# Altium PCB cont_board.PcbDoc
Units mm, origin at the board's own origin, x right, y up, seen from the top; angles counter-clockwise.
Board outline 79.5 x 48 mm, 2 copper layers (Top Layer, Bottom Layer); 23 components, 52 nets, 192 pads, 25 vias.
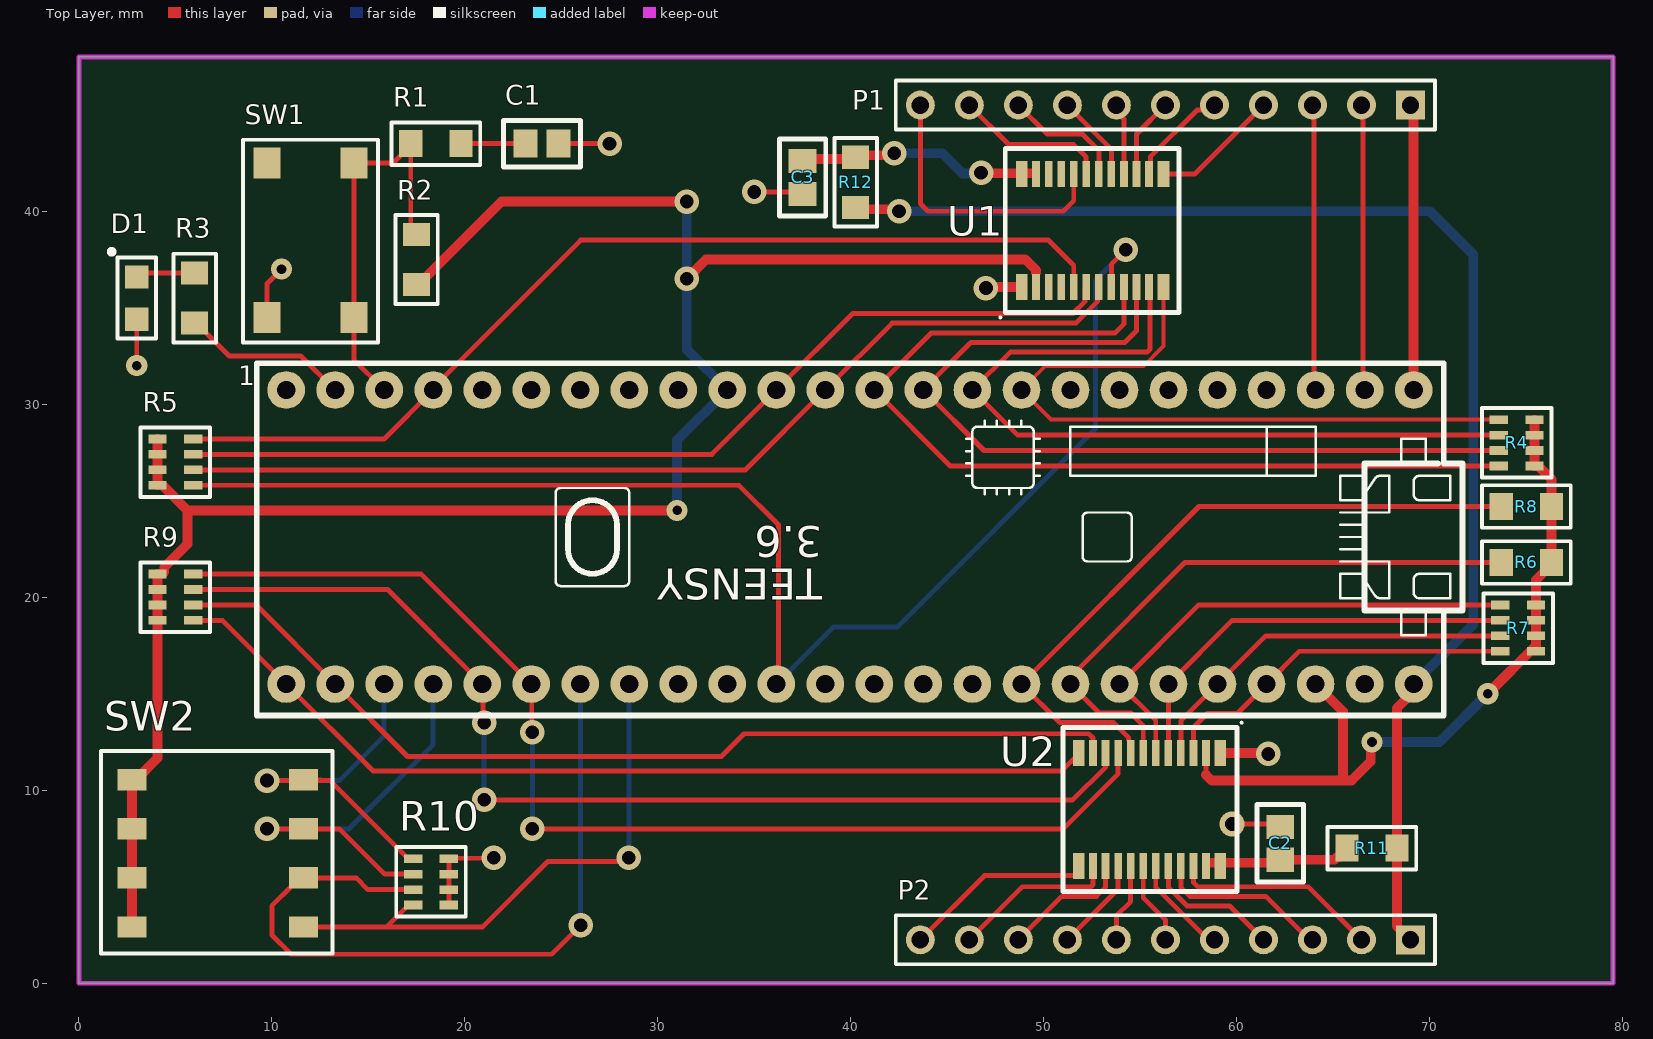
[diagram p0: Top Layer view]
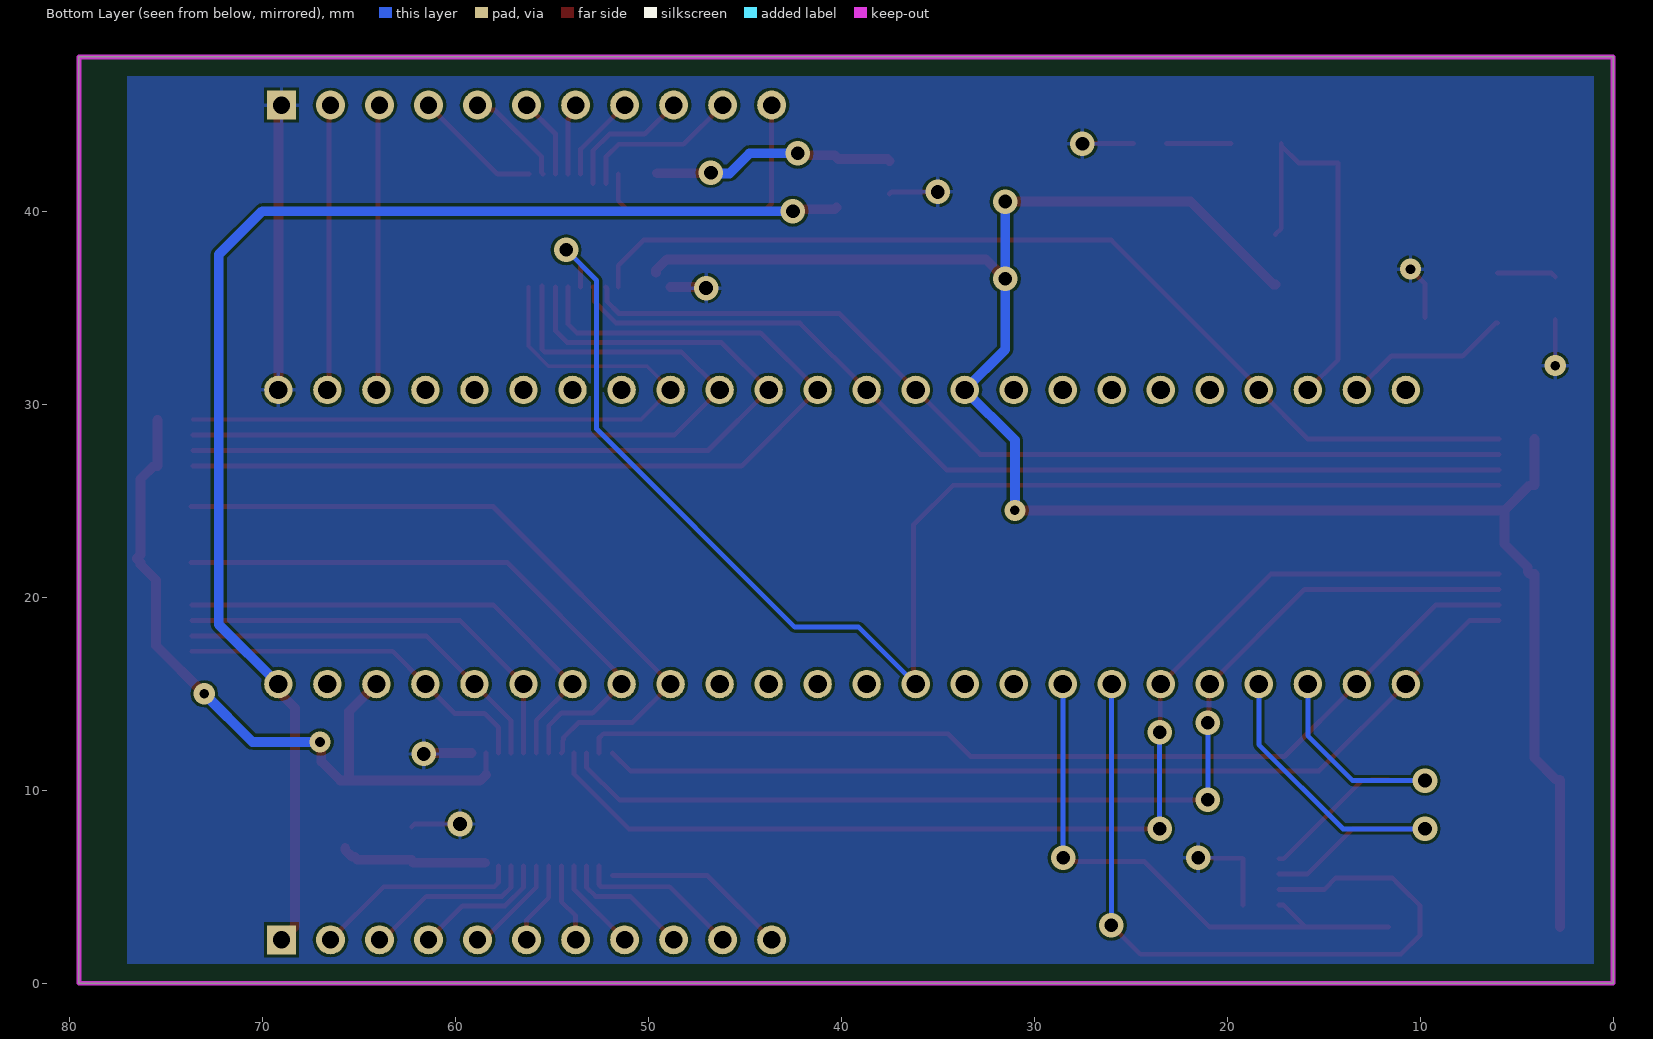
[diagram p1: Bottom Layer view, seen from below]

## Layer stack, top to bottom
Top Solder: solder mask 0.0102, Solder Resist, Dk 3.5
Top Layer: signal copper 0.0356
Dielectric 1: dielectric 0.32, FR-4, Dk 4.8
Bottom Layer: signal copper 0.0356
Bottom Solder: solder mask 0.0102, Solder Resist, Dk 3.5

## Board outline
0,0 79.5,0 79.5,48 0,48

## Design rules (kind name [scope] priority, off if disabled: settings)
BoardOutlineClearance [All] p1: gap=0.381 ignorepadtopadclearanceinfootprint=FALSE
Clearance [All] p1: gap=0.152 ignorepadtopadclearanceinfootprint=FALSE except(0: Arc-Hole Track-Hole SMDPad-Hole THPad-Hole Via-Hole Fill-Hole Poly-Hole Region-Hole Text-Hole)
ComponentClearance [All] p1: gap=0.025 collisioncheckmode=3 verticalgap=0.025 showdistances=FALSE
DiffPairsRouting [All] p1: maxlimit=10 minlimit=0.152 mostfreqgap=0.203 toplayer_minwidth=0.152 toplayer_maxwidth=0.381 toplayer_prefwidth=0.203 bottomlayer_minwidth=0.152 bottomlayer_maxwidth=0.381 bottomlayer_prefwidth=0.203 maxuncoupledlength=12.7
HoleSize [All] p1: absolutevalues=TRUE maxlimit=6.731 minlimit=0.33 maxpercent=80.000 minpercent=20.000
HoleToHoleClearance [All] p1: gap=0.254 allowstackedmicrovias=FALSE
MinimumAnnularRing [All] p1: minimumring=0.178
MinimumSolderMaskSliver [All] p1: minsoldermaskwidth=0
PlaneClearance [All] p1: clearance=0.254
PlaneConnect [All] p1: planeconnectstyle=Direct reliefexpansion=0.406 reliefentries=4 reliefconductorwidth=0.152 reliefairgap=0.152
PolygonConnect [All] p1: connectstyle=Relief reliefconductorwidth=0.203 reliefentries=4 polygonreliefangle="90 Angle" airgapwidth=0.152
RoutingCorners [All] p1: cornerstyle=45-Degree minsetback=1.25 maxsetback=1.25
RoutingVias [All] p1: holewidth=0.381 width=0.762 viastyle="Through Hole" minholewidth=0.33 minwidth=0.686 maxholewidth=2.54 maxwidth=2.896
SilkToSilkClearance [All] p1: silktosilkclearance=0
SilkToSolderMaskClearance [IsPad] p1: minsilkscreentomaskgap=0.152 clearancetoexposedcopper=TRUE
SolderMaskExpansion [All] p1: expansion=0.075 istentingtop=FALSE
Width [All] p1: maxlimit=10.16 minlimit=0.152 preferedwidth=0.203
20 further rules are at their usual default settings.

## Components (designator, comment, footprint, x,y, rotation, side; value= is the part's Value field where it differs from the comment)
1 "TEENSY_3.5/3.6" TEENSY_3.5/3.6 41.22,23.12 r180 top
C1 "1uF" CAP_0805 24,43.5 r180 top
C2 "0.1uF" CAP_0805 62.25,7.25 r270 top
C3 "0.1uF" CAP_0805 37.5,41.75 r90 top
D1 "RED" 150080SS75000 3,35.5 r90 top
P1 "Header 11" HDR1X11 69,45.5 r180 top
P2 "Header 11" HDR1X11 69,2.25 r180 top
R1 "4.7kR" RES_0805_PANASONIC 18.5,43.5 r90 top
R2 "4.7kR" RES_0805_PANASONIC 17.5,37.5 r180 top
R3 "330R" RES_0805_PANASONIC 6,35.5 r0 top
R4 "4.7kR" CAY16-472J4LF 74.5,28 r270 top
R5 "4.7kR" CAY16-472J4LF 5,27 r90 top
R6 "4.7kR" RES_0805_PANASONIC 75,21.8 r90 top
R7 "4.7kR" CAY16-472J4LF 74.575,18.4 r270 top
R8 "4.7kR" RES_0805_PANASONIC 75,24.7 r90 top
R9 "4.7kR" CAY16-472J4LF 5,20 r90 top
R10 "4.7kR" CAY16-472J4LF 18.25,5.25 r90 top
R11 "200kR" RES_0805_PANASONIC 67,7 r90 top
R12 "200kR" RES_0805_PANASONIC 40.25,41.5 r0 top
SW1 "B3FS-1000P" B3FS-1000P 12,38.5 r90 top
SW2 "DIP 4 SWITCH" DS04-254-2-04BK-SMT-TR 11.65,10.54 r270 top
U1 "NVT2010PW" NVT2010 52.5,39 r90 top
U2 "NVT2010PW" NVT2010 55.5,9 r270 top

## Footprints (in the part's own frame and the unit in brackets; to place one, negate y for a bottom-side part, rotate by r counter-clockwise, add the part's x,y. Pads: shape width x height; smd on the part's side, far side on the other; paste and mask are expansions set on the pad)
150080SS75000 [mm] "150080SS75000"
  rect 1.2x1.2 smd mask+0.06: 1(-1.1,0) 2(1.1,0)
  silkscreen extent -2.1,-1 2.52,1.42
B3FS-1000P [mm] "B3FS-1000P"
  rect 1.6x1.4 smd mask+0.06: 1(-4,2.25) 1(4,2.25) 2(-4,-2.25) 2(4,-2.25)
  silkscreen extent -5.3,-3.5 5.2,3.5, body extent -4.1,-3.15 3.9,3.15, height 3.11
CAP_0805 [mm] "Chip Capacitor, 2-Leads, Body 2.05x1.30mm, IPC Medium Density"
  rect 1.25x1.45 smd mask+0.06: 1(-0.85,0) 2(0.85,0)
  silkscreen extent -2,-1.2 2,1.2, body extent -1.07,-0.7 1.07,0.7, height 1.25
CAY16-472J4LF [mm] "CAY16-472J4LF"
  rect 0.45x0.95 smd mask+0.06: 1(-1.2,0.925) 2(-1.2,-0.925) 3(-0.4,0.925) 4(-0.4,-0.925) 5(0.4,0.925) 6(0.4,-0.925) 7(1.2,0.925) 8(1.2,-0.925)
  silkscreen extent -1.8,-1.8 1.8,1.8, body extent -1.6,-0.8 1.6,0.8, height 0.51
DS04-254-2-04BK-SMT-TR [mm] "DIP SWITCH, SPST, 2.54 PITCH, FL"
  rect 1.1x1.5 smd mask+0.06: 1(0,0) 2(2.54,0) 3(5.08,0) 4(7.62,0) 5(7.62,-8.9) 6(5.08,-8.9) 7(2.54,-8.9) 8(0,-8.9)
  silkscreen extent -1.5,-10.5 9,1.5, body extent -1.78,-9.42 9.38,0.47, height 4.01
HDR1X11 [mm] "Connector; Header; 11 Position"
  rect 1.5x1.5 hole 0.9: 1(0,0)
  round 1.5 hole 0.9: 2(2.54,0) 3(5.08,0) 4(7.62,0) 5(10.16,0) 6(12.7,0) 7(15.24,0) 8(17.78,0) 9(20.32,0) 10(22.86,0) 11(25.4,0)
  silkscreen extent -1.27,-1.27 26.67,1.27
NVT2010 [mm]
  rect 1.35x0.6 smd mask+0.05: 1(-2.925,3.65) 12(-2.925,-3.7) 13(2.925,-3.7) 24(2.925,3.65)
  rect 1.35x0.4 smd mask+0.05: 2(-2.925,2.9) 3(-2.925,2.25) 4(-2.925,1.6) 5(-2.925,0.95) 6(-2.925,0.3) 7(-2.925,-0.35) 8(-2.925,-1) 9(-2.925,-1.65) 10(-2.925,-2.3) 11(-2.925,-2.95) 14(2.925,-2.95) 15(2.925,-2.3) 16(2.925,-1.65) 17(2.925,-1) 18(2.925,-0.35) 19(2.925,0.3) 20(2.925,0.95) 21(2.925,1.6) 22(2.925,2.25) 23(2.925,2.9)
  silkscreen extent -4.55,-4.5 4.25,4.8
RES_0805_PANASONIC [mm]
  rect 1.4x1.2 smd mask+0.06: 1(0,1.3) 2(0,-1.3)
  silkscreen extent -1.1,-2.3 1.1,2.3
TEENSY_3.5/3.6 [mm]
  round 1.95 / inner round 1.473 / far side round 1.473 hole 0.95 mask+0.06: 0/RX(-25.4,-7.62) 1/TX(-22.86,-7.62) 2(-20.32,-7.62) 3/CANTX(-17.78,-7.62) 3V3(7.62,-7.62) 3V3_LO(-22.86,7.62) 4/CANRX(-15.24,-7.62) 5(-12.7,-7.62) 6(-10.16,-7.62) 7(-7.62,-7.62) 8(-5.08,-7.62) 9/CS(-2.54,-7.62) 10/CS(0,-7.62) 11/MOSI(2.54,-7.62) 12/MISO(5.08,-7.62) 13/SCK(5.08,7.62) 14/A0(2.54,7.62) 15/A1(0,7.62) 16/A2(-2.54,7.62) 17/A3(-5.08,7.62) 18/A4/SDA(-7.62,7.62) 19/A5/SCL(-10.16,7.62) 20/A6(-12.7,7.62) 21/A7(-15.24,7.62) 21/DAC0(12.7,7.62) 22/A8(-17.78,7.62) 23/A9(-20.32,7.62) 24(10.16,-7.62) 25(12.7,-7.62) 26(15.24,-7.62) 27(17.78,-7.62) 28(20.32,-7.62) 29(22.86,-7.62) 30(25.4,-7.62) 31/A12(27.94,-7.62) 32/A13(30.48,-7.62) 33/A14(30.48,7.62) 34/A15(27.94,7.62) 35/A16(25.4,7.62) 36/A17(22.86,7.62) 37/A18(20.32,7.62) 38/A19(17.78,7.62) 39/A20(15.24,7.62) A22/DAC1(10.16,7.62) AGND(-25.4,7.62) GND(-27.94,-7.62) GND2(7.62,7.62) VIN(-27.94,7.62)
  silkscreen extent -30.48,-9 32,9.25

## Part data
C1: library part C0805C105Z4VACTU, "Cap Ceramic 1uF 16V Y5V -20% to 80% Pad SMD 0805 85C T/R", Case Code (Imperial)=0805, Case Code (Metric)=2012, Dielectric=Y5V, Dielectric Material=Ceramic, Manufacturer=KEMET, Max Operating Temperature=85°C, Min Operating Temperature=-30°C, Package Quantity=1, Supplier Part Number 1=399-8011-1-ND, Tolerance=80%, Voltage=16V, Capacitance=1uF, Case/Package=0805, Category=Capacitor, ComponentLink1Description=https://datasheet.ciiva.com/6074/1698780-6074369.pdf?src-supplier=Farnell, ComponentLink1URL=https://datasheet.ciiva.com/6074/1698780-6074369.pdf?src-supplier=Farnell, ComponentLink2Description=https://datasheet.ciiva.com/16623/datasheetpn-c0805c105z4vac7800-16623623.pdf?src-supplier=Avnet+Europe, ComponentLink2URL=https://datasheet.ciiva.com/16623/datasheetpn-c0805c105z4vac7800-16623623.pdf?src-supplier=Avnet+Europe, ComponentLink3Description=https://datasheet.ciiva.com/14604/70095383-14604106.pdf?src-supplier=Allied+Electronics, ComponentLink3URL=https://datasheet.ciiva.com/14604/70095383-14604106.pdf?src-supplier=Allied+Electronics, ComponentLink4Description=https://datasheet.ciiva.com/7600/1698780-7600029.pdf?src-supplier=Newark, ComponentLink4URL=https://datasheet.ciiva.com/7600/1698780-7600029.pdf?src-supplier=Newark, ComponentLink5Description=https://datasheet.ciiva.com/14589/70095383-14589407.pdf?src-supplier=Allied+Electronics, ComponentLink5URL=https://datasheet.ciiva.com/14589/70095383-14589407.pdf?src-supplier=Allied+Electronics, ComponentLink6Description=http://datasheet.octopart.com/C0805C105Z4VACTU-Kemet-datasheet-13692877.pdf?src-supplier=Element14, ComponentLink6URL=http://datasheet.octopart.com/C0805C105Z4VACTU-Kemet-datasheet-13692877.pdf?src-supplier=Element14, ComponentLink7Description=http://datasheet.octopart.com/C0805C105Z4VACTU-Kemet-datasheet-503297.pdf?src-supplier=Newark, ComponentLink7URL=http://datasheet.octopart.com/C0805C105Z4VACTU-Kemet-datasheet-503297.pdf?src-supplier=Newark, ComponentLink8Description=http://datasheet.octopart.com/C0805C105Z4VACTU-KEMET-datasheet-101576167.pdf?src-supplier=Farnell, ComponentLink8URL=http://datasheet.octopart.com/C0805C105Z4VACTU-KEMET-datasheet-101576167.pdf?src-supplier=Farnell, ComponentLink9Description=http://datasheet.octopart.com/C0805C105Z4VACTU-KEMET-datasheet-83957834.pdf?src-supplier=TME, ComponentLink9URL=http://datasheet.octopart.com/C0805C105Z4VACTU-KEMET-datasheet-83957834.pdf?src-supplier=TME, ComponentLink10Description=http://datasheet.octopart.com/C0805C105Z4VACTU-Kemet-datasheet-5313890.pdf?src-supplier=Verical, ComponentLink10URL=http://datasheet.octopart.com/C0805C105Z4VACTU-Kemet-datasheet-5313890.pdf?src-supplier=Verical, ComponentLink11Description=http://datasheet.octopart.com/C0805C105Z4VAC-TU-Kemet-datasheet-8204015.pdf?src-supplier=Jameco, ComponentLink11URL=http://datasheet.octopart.com/C0805C105Z4VAC-TU-Kemet-datasheet-8204015.pdf?src-supplier=Jameco, ComponentLink12Description=http://datasheet.octopart.com/C0805C105Z4VACTU-Kemet-datasheet-464.pdf?src-supplier=Allied+Electronics, ComponentLink12URL=http://datasheet.octopart.com/C0805C105Z4VACTU-Kemet-datasheet-464.pdf?src-supplier=Allied+Electronics, ComponentLink13Description=http://datasheet.octopart.com/C0805C105Z4VACTU-Kemet-datasheet-11554470.pdf?src-supplier=Arrow, ComponentLink13URL=http://datasheet.octopart.com/C0805C105Z4VACTU-Kemet-datasheet-11554470.pdf?src-supplier=Arrow, ComponentLink14Description=http://datasheet.octopart.com/C0805C105Z4VACTU-Kemet-datasheet-66128697.pdf?src-supplier=Element14, ComponentLink14URL=http://datasheet.octopart.com/C0805C105Z4VACTU-Kemet-datasheet-66128697.pdf?src-supplier=Element14, ComponentLink15Description=http://datasheet.octopart.com/C0805C105Z4VACTU-Kemet-datasheet-66325528.pdf?src-supplier=Newark, ComponentLink15URL=http://datasheet.octopart.com/C0805C105Z4VACTU-Kemet-datasheet-66325528.pdf?src-supplier=Newark, ComponentLink16Description=http://datasheet.octopart.com/C0805C105Z4VACTU-Kemet-datasheet-67847115.pdf?src-supplier=TME, ComponentLink16URL=http://datasheet.octopart.com/C0805C105Z4VACTU-Kemet-datasheet-67847115.pdf?src-supplier=TME, ComponentLink17Description=http://datasheet.octopart.com/C0805C105Z4VACTU-KEMET-datasheet-84169754.pdf, ComponentLink17URL=http://datasheet.octopart.com/C0805C105Z4VACTU-KEMET-datasheet-84169754.pdf, ComponentLink18Description=http://datasheet.octopart.com/C0805C105Z4VACTU-KEMET-datasheet-41193421.pdf?src-supplier=Master+Electronics, ComponentLink18URL=http://datasheet.octopart.com/C0805C105Z4VACTU-KEMET-datasheet-41193421.pdf?src-supplier=Master+Electronics, Contact Material=Tin, Depth=1.25mm, Dissipation Factor=7%, Height=1.25mm, Lead Free="Lead Free", Lead Pitch=0.75mm, Length=2mm, Manufacturer Part Number=C0805C105Z4VACTU, Mount="Surface Mount", Number of Pins=2, Packaging="Tape and Reel", Pricing 1="1=0.11000, 10=0.08100, 50=0.04420, 100=0.03620, 500=0.02584, 1000=0.02030 (USD)", Radiation Hardening=No, REACH SVHC="No SVHC", Stock 1=83211, Supplier 1=Digi-Key, Termination=SMD/SMT, Thickness=0.055inch, Voltage Rating=16V, Voltage Rating (DC)=16V, Width=0.049inch
C2 C3: library part C0805C104M3RACTU, "CAP CER 0.1UF 25V X7R 0805", Capacitance=100nF, Case Code (Imperial)=0805, Case Code (Metric)=2012, Dielectric=X7R, Dielectric Material=Ceramic, Manufacturer=KEMET, Max Operating Temperature=125°C, Min Operating Temperature=-55°C, Package Quantity=1, Supplier Part Number 1=399-8000-1-ND, Tolerance=20%, Voltage=25V, Case/Package=0805, Category=Capacitor, ComponentLink1Description=http://www.mouser.com/ds/2/212/KEM_C1002_X7R_SMD-1102033.pdf?src-supplier=Mouser, ComponentLink1URL=http://www.mouser.com/ds/2/212/KEM_C1002_X7R_SMD-1102033.pdf?src-supplier=Mouser, ComponentLink2Description=http://uk.rs-online.com/webdocs/13da/0900766b813da9ff.pdf?src-supplier=RSComponents, ComponentLink2URL=http://uk.rs-online.com/webdocs/13da/0900766b813da9ff.pdf?src-supplier=RSComponents, ComponentLink3Description=http://components.arrow.com/part/dataview/0323_00178100?src-supplier=Arrow+Europe, ComponentLink3URL=http://components.arrow.com/part/dataview/0323_00178100?src-supplier=Arrow+Europe, ComponentLink4Description=https://www.alliedelec.com/m/d/6f3b5eb83d09db50ed28bdc730567b33.pdf?src-supplier=Allied+Electronics, ComponentLink4URL=https://www.alliedelec.com/m/d/6f3b5eb83d09db50ed28bdc730567b33.pdf?src-supplier=Allied+Electronics, ComponentLink5Description=http://www.farnell.com/datasheets/2746330.pdf?src-supplier=Farnell, ComponentLink5URL=http://www.farnell.com/datasheets/2746330.pdf?src-supplier=Farnell, ComponentLink6Description=http://www.jameco.com/Jameco/Products/ProdDS/1566487.pdf?src-supplier=Jameco, ComponentLink6URL=http://www.jameco.com/Jameco/Products/ProdDS/1566487.pdf?src-supplier=Jameco, ComponentLink7Description=http://components.arrow.com/part/dataview/2091097S3491315N7429?src-supplier=Arrow+Electronics, ComponentLink7URL=http://components.arrow.com/part/dataview/2091097S3491315N7429?src-supplier=Arrow+Electronics, ComponentLink8Description=https://www.alliedelec.com/m/d/e7aa2b5497e2375e4ffc0e8be19e16e2.pdf?src-supplier=Allied+Electronics, ComponentLink8URL=https://www.alliedelec.com/m/d/e7aa2b5497e2375e4ffc0e8be19e16e2.pdf?src-supplier=Allied+Electronics, ComponentLink9Description=http://uk.rs-online.com/webdocs/13da/0900766b813daa05.pdf?src-supplier=RSComponents, ComponentLink9URL=http://uk.rs-online.com/webdocs/13da/0900766b813daa05.pdf?src-supplier=RSComponents, ComponentLink10Description=http://www.farnell.com/datasheets/2746330.pdf?src-supplier=Element14, ComponentLink10URL=http://www.farnell.com/datasheets/2746330.pdf?src-supplier=Element14, ComponentLink11Description=https://api.kemet.com/component-edge/download/datasheet/C0805C104M3RACTU.pdf?src-supplier=Digi-Key, ComponentLink11URL=https://api.kemet.com/component-edge/download/datasheet/C0805C104M3RACTU.pdf?src-supplier=Digi-Key, ComponentLink12Description=http://www.farnell.com/datasheets/1828800.pdf?src-supplier=Newark, ComponentLink12URL=http://www.farnell.com/datasheets/1828800.pdf?src-supplier=Newark, ComponentLink13Description=http://www.farnell.com/datasheets/2746330.pdf?src-supplier=Newark, ComponentLink13URL=http://www.farnell.com/datasheets/2746330.pdf?src-supplier=Newark, ComponentLink14Description=http://capacitoredge.kemet.com/capedge2/DataSheet?pn=C0805C104M3RACTU&src-supplier=Avnet, ComponentLink14URL=http://capacitoredge.kemet.com/capedge2/DataSheet?pn=C0805C104M3RACTU&src-supplier=Avnet, Depth=1.25mm, Dissipation Factor=5%, Height=0.9mm, Lead Pitch=0.75mm, Length=2mm, Manufacturer Part Number=C0805C104M3RACTU, Mount="Surface Mount", Packaging="Tape and Reel", Pricing 1="1=0.10000, 10=0.06800, 50=0.03700, 100=0.03020, 500=0.02160, 1000=0.01697 (USD)", Radiation Hardening=No, REACH SVHC="No SVHC", RoHS=Yes, Stock 1=305175, Supplier 1=Digi-Key, Termination=SMD/SMT, Thickness=0.035inch, Voltage Rating=25V, Voltage Rating (DC)=25V, Width=0.049inch
D1: library part 150080SS75000, "WURTH ELEKTRONIK   150080SS75000   LED, 0805, SUP RED, 60MCD, 630NM", Case Code (Imperial)=0805, Case Code (Metric)=2012, Color=Red, Forward Current=30mA, Forward Voltage=1.9V, Manufacturer="Wurth Electronics", Max Operating Temperature=85°C, Min Operating Temperature=-40°C, Package Quantity=4000, Supplier Part Number 1=732-4985-1-ND, Test Current=20mA, Case/Package=0805, Category=LEDs, ComponentLink1Description=https://datasheet.ciiva.com/22656/150080ss75000-22656963.pdf?src-supplier=Element14, ComponentLink1URL=https://datasheet.ciiva.com/22656/150080ss75000-22656963.pdf?src-supplier=Element14, ComponentLink2Description=https://datasheet.ciiva.com/29279/759436-da-01-en-chipled-0805-w-kl-s-rot-150080ss75000-29279211.pdf?src-supplier=Conrad, ComponentLink2URL=https://datasheet.ciiva.com/29279/759436-da-01-en-chipled-0805-w-kl-s-rot-150080ss75000-29279211.pdf?src-supplier=Conrad, ComponentLink3Description=https://datasheet.ciiva.com/29563/150080ss75000-29563014.pdf?src-supplier=Digi-Key, ComponentLink3URL=https://datasheet.ciiva.com/29563/150080ss75000-29563014.pdf?src-supplier=Digi-Key, ComponentLink4Description=https://datasheet.ciiva.com/29563/150080ss75000-29563015.pdf?src-supplier=Digi-Key, ComponentLink4URL=https://datasheet.ciiva.com/29563/150080ss75000-29563015.pdf?src-supplier=Digi-Key, ComponentLink5Description=https://datasheet.ciiva.com/29563/150080ss75000-29563013.pdf?src-supplier=Digi-Key, ComponentLink5URL=https://datasheet.ciiva.com/29563/150080ss75000-29563013.pdf?src-supplier=Digi-Key, Dominant Wavelength=630nm, Height=0.7mm, Length=2mm, Lens Style=Clear,Rectangular, Luminous Intensity=60mcd, Manufacturer Part Number=150080SS75000, Mount="Surface Mount", Packaging="Tape and Reel", Pricing 1="1=0.18000, 50=0.16500, 100=0.14200, 500=0.12300 (USD)", REACH SVHC=Unknown, RoHS=Yes, Stock 1=6006, Supplier 1=Digi-Key, Viewing Angle=140°, Wavelength=630nm, Width=1.25mm
P1 P2: "Header, 11-Pin", LatestRevisionDate=17-Jul-2002, LatestRevisionNote="Re-released for DXP Platform.", Publisher="Altium Limited"
R1 R2 R6 R8: library part ERA-6AED472V, "Res Thin Film 0805 4.7K Ohm 0.5% 0.125W(1/8W) ±25ppm/C Molded SMD Automotive Punched T/R", Case Code (Imperial)=0805, Case Code (Metric)=2012, Manufacturer=Panasonic, Max Operating Temperature=155°C, Min Operating Temperature=-55°C, Package Quantity=5000, Power Rating=125mW, Resistor Type="Metal Film,Thin Film", Supplier Part Number 1=P123914CT-ND, Temperature Coefficient=25ppm/°C, Tolerance=0.5%, Voltage Rating=100V, Case/Package=0805, Category="Chip SMD Resistors", ComponentLink1Description=https://datasheet.ciiva.com/24027/aoa0000ce26-32660-24027576.pdf?src-supplier=Mouser, ComponentLink1URL=https://datasheet.ciiva.com/24027/aoa0000ce26-32660-24027576.pdf?src-supplier=Mouser, Contact Plating=Tin, Depth=1.25mm, Height=0.5mm, Lead Free="Lead Free", Length=2mm, Manufacturer Part Number=ERA-6AED472V, Military Standard=Not, Mount="Surface Mount", Packaging="Tape and Reel", Pricing 1="1=0.10000, 10=0.09400, 100=0.03600, 1000=0.01584, 2500=0.01368 (USD)", Resistance=4.7kR, RoHS=Yes, Stock 1=25343, Supplier 1=Digi-Key, Width=1.25mm
R3: library part ERA-6AED331V, "Res Thin Film 0805 330 Ohm 0.5% 0.125W(1/8W) ±25ppm/C Molded SMD Automotive Punched T/R", Case Code (Imperial)=0805, Case Code (Metric)=2012, Manufacturer=Panasonic, Max Operating Temperature=155°C, Min Operating Temperature=-55°C, Package Quantity=5000, Power Rating=125mW, Resistor Type="Thin Film", Supplier Part Number 1=P123837CT-ND, Temperature Coefficient=25ppm/°C, Tolerance=0.5%, Voltage Rating=200V, Case/Package=0805, Category=Resistor, ComponentLink1Description=https://datasheet.ciiva.com/24071/aoa0000ce26-197354-24071480.pdf?src-supplier=Mouser, ComponentLink1URL=https://datasheet.ciiva.com/24071/aoa0000ce26-197354-24071480.pdf?src-supplier=Mouser, ComponentLink2Description=https://datasheet.ciiva.com/9182/aoa0000ce26-9182970.pdf?src-supplier=Avnet, ComponentLink2URL=https://datasheet.ciiva.com/9182/aoa0000ce26-9182970.pdf?src-supplier=Avnet, Contact Plating=Tin, Depth=1.25mm, Height=0.5mm, Lead Free="Lead Free", Length=2mm, Manufacturer Part Number=ERA-6AED331V, Military Standard=Not, Mount="Surface Mount", Packaging="Tape and Reel", Pricing 1="1=0.10000, 10=0.09400, 25=0.06480, 50=0.05040, 100=0.03600, 250=0.02808, 500=0.02232, 1000=0.01584 (USD)", Resistance=330R, RoHS=Yes, Stock 1=11862, Supplier 1=Digi-Key, Termination=SMD/SMT, Width=1.25mm
R4 R5 R7 R9 R10: library part CAY16-472J4LF, "RES ARRAY 4 RES 4.7K OHM 1206", Case Code (Imperial)=1206, Case Code (Metric)=3216, Manufacturer=Bourns, Max Operating Temperature=125°C, Min Operating Temperature=-55°C, Number of Resistors=4, Package Quantity=1, Power Per Element=62.5mW, Power Rating=248mW, Supplier Part Number 1=CAY16-472J4LFCT-ND, Temperature Coefficient=200ppm/°C, Tolerance=5%, Voltage Rating=50V, Case/Package=1206, Category=Resistor, Circuit Type=Isolated, ComponentLink1Description=https://datasheet.ciiva.com/19466/1979708-19466930.pdf?src-supplier=Jameco, ComponentLink1URL=https://datasheet.ciiva.com/19466/1979708-19466930.pdf?src-supplier=Jameco, ComponentLink2Description=https://datasheet.ciiva.com/11807/0900766b8064e462-11807155.pdf?src-supplier=RSComponents, ComponentLink2URL=https://datasheet.ciiva.com/11807/0900766b8064e462-11807155.pdf?src-supplier=RSComponents, ComponentLink3Description=https://datasheet.ciiva.com/1478/1849489-1478912.pdf?src-supplier=Element14, ComponentLink3URL=https://datasheet.ciiva.com/1478/1849489-1478912.pdf?src-supplier=Element14, ComponentLink4Description=https://datasheet.ciiva.com/25907/catcay-25907158.pdf?src-supplier=Avnet+Europe, ComponentLink4URL=https://datasheet.ciiva.com/25907/catcay-25907158.pdf?src-supplier=Avnet+Europe, ComponentLink5Description=https://datasheet.ciiva.com/30249/catcay-30249688.pdf?src-supplier=Onlinecomponents.com, ComponentLink5URL=https://datasheet.ciiva.com/30249/catcay-30249688.pdf?src-supplier=Onlinecomponents.com, ComponentLink6Description=https://datasheet.ciiva.com/6494/catcay-6494015.pdf?src-supplier=Digi-Key, ComponentLink6URL=https://datasheet.ciiva.com/6494/catcay-6494015.pdf?src-supplier=Digi-Key, ComponentLink7Description=https://datasheet.ciiva.com/3264/catcay-3264889.pdf?src-supplier=Avnet, ComponentLink7URL=https://datasheet.ciiva.com/3264/catcay-3264889.pdf?src-supplier=Avnet, ComponentLink8Description=https://datasheet.ciiva.com/3263/catcay-3263770.pdf?src-supplier=Avnet, ComponentLink8URL=https://datasheet.ciiva.com/3263/catcay-3263770.pdf?src-supplier=Avnet, ComponentLink9Description=https://datasheet.ciiva.com/1478/1849489-1478911.pdf?src-supplier=Element14, ComponentLink9URL=https://datasheet.ciiva.com/1478/1849489-1478911.pdf?src-supplier=Element14, Composition="Thick Film", Contact Plating=Tin, Depth=1.6mm, Height=0.024inch, Length=3.2mm, Manufacturer Part Number=CAY16-472J4LF, Military Standard=Not, Mount="Surface Mount", Number of Circuits=4, Number of Elements=4, Number of Pins=8, Number of Terminals=8, Packaging="Tape and Reel", Pricing 1="1=0.10000, 10=0.06900, 25=0.04760, 50=0.03720, 100=0.02650, 250=0.02068, 500=0.01644, 1000=0.01166 (USD)", Radiation Hardening=No, REACH SVHC="No SVHC", Resistance=4.7kR, RoHS=Yes, Stock 1=28152, Supplier 1=Digi-Key, Terminal Pitch=0.8mm, Termination=Convex, Voltage Rating (DC)=50V, Width=0.063inch
R11 R12: library part CRCW0805200KJNEA, "VISHAY         CRCW0805200KJNEA             RES, THICK FILM, 200K, 5%, 0.125W, 0805", Case Code (Imperial)=0805, Case Code (Metric)=2012, Manufacturer="Vishay Dale", Max Operating Temperature=155°C, Max Power Dissipation=125mW, Min Operating Temperature=-55°C, Package Quantity=5000, Resistance Tolerance=5%, Resistor Type="Thick Film", Supplier Part Number 1=541-200KACT-ND, Temperature Coefficient=200ppm/°C, Voltage Rating=150V, Case/Package=0805, Category="Chip SMD Resistors", ComponentLink1Description=https://datasheet.ciiva.com/3258/dcrcwe3-3258301.pdf?src-supplier=Avnet, ComponentLink1URL=https://datasheet.ciiva.com/3258/dcrcwe3-3258301.pdf?src-supplier=Avnet, ComponentLink2Description=https://datasheet.ciiva.com/2464/dcrcwe3-2464324.pdf?src-supplier=Digi-Key, ComponentLink2URL=https://datasheet.ciiva.com/2464/dcrcwe3-2464324.pdf?src-supplier=Digi-Key, ComponentLink3Description=https://datasheet.ciiva.com/2464/dcrcwe3-2464325.pdf?src-supplier=Digi-Key, ComponentLink3URL=https://datasheet.ciiva.com/2464/dcrcwe3-2464325.pdf?src-supplier=Digi-Key, ComponentLink4Description=https://datasheet.ciiva.com/2464/dcrcwe3-2464326.pdf?src-supplier=Digi-Key, ComponentLink4URL=https://datasheet.ciiva.com/2464/dcrcwe3-2464326.pdf?src-supplier=Digi-Key, ComponentLink5Description=https://datasheet.ciiva.com/16199/dcrcwe3-16199560.pdf?src-supplier=Future+Electronics, ComponentLink5URL=https://datasheet.ciiva.com/16199/dcrcwe3-16199560.pdf?src-supplier=Future+Electronics, ComponentLink6Description=https://datasheet.ciiva.com/22870/70201119-22870413.pdf?src-supplier=Allied+Electronics, ComponentLink6URL=https://datasheet.ciiva.com/22870/70201119-22870413.pdf?src-supplier=Allied+Electronics, ComponentLink7Description=https://datasheet.ciiva.com/16786/70201119-16786315.pdf?src-supplier=Allied+Electronics, ComponentLink7URL=https://datasheet.ciiva.com/16786/70201119-16786315.pdf?src-supplier=Allied+Electronics, Construction=Rectangular, Contact Plating=Tin, Depth=1.25mm, Features="Automotive AEC-Q200", Height=0.02inch, Lead Free="Lead Free", Length=2mm, Manufacturer Part Number=CRCW0805200KJNEA, Military Standard=Not, Number of Terminations=2, Packaging="Tape and Reel", Power Rating=125mW, Pricing 1="1=0.10000, 10=0.05000, 100=0.02040, 1000=0.00914, 2500=0.00794 (USD)", Radiation Hardening=No, REACH SVHC=Unknown, Resistance=200kR, RoHS=Yes, RoHS Compliant=Yes, Series=CRCW, Stock 1=6536, Supplier 1=Digi-Key, Technology="THICK FILM", Termination=SMD/SMT, Tolerance=5%, Voltage Rating (DC)=150V, Weight=0.000194oz, Width=1.25mm, Working Voltage=150V
SW1: "OMRON - B3FS1000P - SWITCH, FLAT, 6X6X3.1, 100GF", Case/Package=SMD/SMT, Contact Current Rating=50mA, Contact Resistance=100mR, Manufacturer=Omron, Max Operating Temperature=70°C, Max Voltage Rating (DC)=24V, Min Operating Temperature=-25°C, Operating Force=0.98N, Package Quantity=1, Supplier Part Number 1=SW423CT-ND, Actuator Length=0.5mm, Actuator Type=Standard, Category=Switch, ComponentLink1Description=https://datasheet.ciiva.com/2899/en-b3fs-2899744.pdf?src-supplier=Digi-Key, ComponentLink1URL=https://datasheet.ciiva.com/2899/en-b3fs-2899744.pdf?src-supplier=Digi-Key, ComponentLink2Description=https://datasheet.ciiva.com/2899/en-b3fs-2899745.pdf?src-supplier=Digi-Key, ComponentLink2URL=https://datasheet.ciiva.com/2899/en-b3fs-2899745.pdf?src-supplier=Digi-Key, ComponentLink3Description=https://datasheet.ciiva.com/2899/en-b3fs-2899746.pdf?src-supplier=Digi-Key, ComponentLink3URL=https://datasheet.ciiva.com/2899/en-b3fs-2899746.pdf?src-supplier=Digi-Key, ComponentLink4Description=https://datasheet.ciiva.com/1532/en-b3fs-1532627.pdf?src-supplier=Element14, ComponentLink4URL=https://datasheet.ciiva.com/1532/en-b3fs-1532627.pdf?src-supplier=Element14, ComponentLink5Description=https://datasheet.ciiva.com/26827/getdatasheetpartid-131603-26827237.pdf?src-supplier=Verical, ComponentLink5URL=https://datasheet.ciiva.com/26827/getdatasheetpartid-131603-26827237.pdf?src-supplier=Verical, ComponentLink6Description=https://datasheet.ciiva.com/16154/en-b3fs-16154936.pdf?src-supplier=Onlinecomponents.com, ComponentLink6URL=https://datasheet.ciiva.com/16154/en-b3fs-16154936.pdf?src-supplier=Onlinecomponents.com, ComponentLink7Description=https://datasheet.ciiva.com/30214/b3fs-0714-30214221.pdf?src-supplier=Onlinecomponents.com, ComponentLink7URL=https://datasheet.ciiva.com/30214/b3fs-0714-30214221.pdf?src-supplier=Onlinecomponents.com, Contact Material=Silver, Contact Plating=Silver, Current Rating=50mA, Depth=8mm, Electrical Life=1000000Cycles, Illumination Type=Non-Illuminated,Illuminated, Lead Free="Lead Free", Length=6.3mm, Manufacturer Part Number=B3FS-1000P, Material=Plastic, Max Current Rating=50mA, Mechanical Life=1000000Cycles, Mount="Surface Mount", Number of Poles=1, Orientation=Straight, Packaging="Tape and Reel", Pricing 1="1=0.59000, 10=0.57000, 25=0.54880, 100=0.47500, 250=0.43276, 500=0.40110, 1000=0.35887 (USD)", REACH SVHC=Unknown, RoHS=Yes, Stock 1=62498, Supplier 1=Digi-Key, Switch Function=Off-Mom, Switch Travel=0.25mm, Termination="Gull Wing", Throw Configuration=SPST, Voltage Rating (DC)=24V, Weight=0.2g
SW2: library part DS04-254-2-04BK-SMT-TR, Manufacturer=CUI, Supplier Part Number 1=2223-DS04-254-2-04BK-SMT-CT-ND, Manufacturer Part Number=DS04-254-2-04BK-SMT-TR, Pricing 1="1=0.66000, 10=0.63400, 25=0.61120, 100=0.52880, 250=0.48176 (USD)", RoHS=Yes, Stock 1=183, Supplier 1=Digi-Key
U1 U2: "10 pin Bidirectional Level Shifter IC", Case/Package=TSSOP, Manufacturer="NXP Semiconductors", Manufacturer Part Number=NVT2010PW,118, Max Operating Temperature=85°C, Max Supply Voltage=5.5V, Min Operating Temperature=-40°C, Min Supply Voltage=1V, Package Quantity=1, Supplier Part Number 1=568-5299-1-ND, Category="Interface ICs", ComponentLink1Description=https://datasheet.ciiva.com/1899/nvt2008-nvt2010-1899186.pdf?src-supplier=Digi-Key, ComponentLink1URL=https://datasheet.ciiva.com/1899/nvt2008-nvt2010-1899186.pdf?src-supplier=Digi-Key, ComponentLink2Description=https://datasheet.ciiva.com/1899/nvt2008-nvt2010-1899187.pdf?src-supplier=Digi-Key, ComponentLink2URL=https://datasheet.ciiva.com/1899/nvt2008-nvt2010-1899187.pdf?src-supplier=Digi-Key, ComponentLink3Description=https://datasheet.ciiva.com/8244/nvt2008-nvt2010-8244294.pdf?src-supplier=Avnet, ComponentLink3URL=https://datasheet.ciiva.com/8244/nvt2008-nvt2010-8244294.pdf?src-supplier=Avnet, ComponentLink4Description=https://datasheet.ciiva.com/1899/nvt2008-nvt2010-1899185.pdf?src-supplier=Digi-Key, ComponentLink4URL=https://datasheet.ciiva.com/1899/nvt2008-nvt2010-1899185.pdf?src-supplier=Digi-Key, Lead Free="Lead Free", Logic Function=Translator, Mount="Surface Mount", Number of Bits=10, Number of Channels=10, Number of Pins=24, Output Type=Voltage, Packaging="Tape and Reel", Pricing 1="1=0.97000, 10=0.86400, 25=0.82000, 100=0.67370, 250=0.62972, 500=0.61508 (USD)", Propagation Delay=1.5ns, Radiation Hardening=No, RoHS=Yes, RoHS Compliant=Yes, Series=-, Stock 1=743, Supplier 1=Digi-Key, Turn-On Delay Time=1.5ns
1: DeviceSetName=TEENSY_3.5/3.6, GateName_1=G$1, LibraryName=Teensy356, Package=TEENSY_3.5/3.6, SymbolName_1=TEENSY_3.5/3.6

## Via types
v1: diameter 1.27, hole 0.711, Top Layer to Bottom Layer, 20 vias
v2: diameter 1.1, hole 0.5, Top Layer to Bottom Layer, 5 vias

## Nets (pads, with @x,y where several pads share a name; then routed paths per layer and width w, separated by ;. In a path a pad name is that pad's centre, name@x,y a point inside that pad or via, vN(x,y) a via of type N, cw(c..) or ccw(c..) an arc to the next point about the centre after c; other vN are vias at no path point)
3V3_0: 1.3V3_LO R4.1 R4.3 R4.5 R4.7 R6.2 R7.1 R7.3 R7.5 R7.7 R8.2 U2.2 | length 40.1
  Top Layer w0.254: 58.4,10.798 U2.2@58.4,11.925
  Top Layer w0.508: 58.4,10.798 58.698,10.5 65.5,10.5 ; 1.3V3_LO 65.5,14.08 65.5,10.5 ; v2(67,12.5) 66.934,12.434 66.934,11.484 65.95,10.5 65.5,10.5 ; v2(73,15) 75.5,17.5 R7.1 75.5,20.9 76.3,21.7 R6.2 76.5,22 76.3,22.2 R8.2 76.3,26.117 75.617,26.8 R4.7 R4.5 R4.3 R4.1
  Bottom Layer w0.508: v2(67,12.5) 70.5,12.5 v2(73,15)
3V3_1: 1.3V3 R2.1 R5.1 R5.3 R5.5 R5.7 R9.1 R9.3 R9.5 R9.7 SW2.5 SW2.6 SW2.7 SW2.8 U1.2 | length 105.5
  Top Layer w0.508: SW2.5 SW2.6 SW2.7 SW2.8 2.95,10.54 4.075,11.665 R9.1 R9.3 R9.5 R9.7 4.325,21.2 4.423,21.298 4.423,21.548 5.625,22.75 5.625,24.5 ; R5.7 R5.5 R5.3 R5.1 4.325,25.8 5.625,24.5 ; R2.1 17.6,36.2 21.9,40.5 v1(31.5,40.5) ; v2(31,24.5) 5.625,24.5 ; v1(31.5,36.5) 32.5,37.5 49.042,37.5 49.459,37.084 49.6,36.942 49.6,36.81
  Bottom Layer w0.508: v2(31,24.5) 31,28.14 1.3V3 31.5,32.84 v1(31.5,36.5) v1(31.5,40.5)
5V: 1.VIN P2.1 R11.2 R12.2 | length 70.4
  Top Layer w0.508: R12.2 40.35,40.1 42.4,40.1 v1(42.5,40) ; P2.1 68.3,2.95 R11.2 68.3,14.25 69.16,15.11 1.VIN
  Bottom Layer w0.508: v1(42.5,40) 70,40 72.25,37.75 72.25,18.59 1.VIN
ADC_nCNVST5: P1.6 U1.15 | length 4.2
  Top Layer w0.254: U1.15 54.8,44 P1.6
ADC_nCNVST33: 1.9/CS R4.6 U1.10 | length 45.7
  Top Layer w0.254: U1.10 54.8,33.8 54.2,33.2 46.22,33.2 1.9/CS 46.9,27.6 R4.6
ADC_nCS5: P1.7 U1.16 | length 3.7
  Top Layer w0.254: P1.7 53.76,45.163 54.15,44.773 U1.16
ADC_nCS33: 1.10/CS R4.8 U1.9 | length 50.3
  Top Layer w0.254: U1.9 54.15,34.15 53.7,33.7 44.18,33.7 1.10/CS 45.16,26.8 R4.8
ADC_nEOC5: P1.11 U1.20 | length 14.8
  Top Layer w0.254: P1.11 43.6,40.4 44,40 51,40 51.55,40.55 U1.20
ADC_nEOC33: 1.29 R5.8 U1.5 | length 51.6
  Top Layer w0.254: R5.8 15.82,28.2 1.29 18.36,30.86 26,38.5 50.24,38.5 51.55,37.19 U1.5
BUZZER: 1.1/TX P1.3 | length 14.8
  Top Layer w0.254: P1.3 64,45.42 64,30.82 1.1/TX
GND: 1.GND C1.1 C2.1 C3.1 D1.1 P1.1 R10.2 R10.4 R10.6 R10.8 SW1.1 U1.1 U2.1 | length 36.8
  Top Layer w0.254: v2(3,32) D1.1 ; SW1.1@9.75,34.5 9.75,36.25 v2(10.5,37) ; R10.2 R10.4 R10.6 R10.8 19.2,6.475 21.475,6.475 v1(21.5,6.5) ; C1.1 v1(27.5,43.5) ; v1(35,41) 37.4,41 C3.1 ; v1(59.75,8.25) 62.1,8.25 C2.1
  Top Layer w0.508: v1(47,36.016) 47.059,36.075 U1.1 ; U2.1 61.575,11.925 v1(61.623,11.878) ; 1.GND P1.1@69.16,45.5
GPIO5_0: P1.5 U1.14 | length 5.4
  Top Layer w0.254: U1.14 55.523,41.998 55.523,42.823 57.937,45.237 58.24,45.237 58.503,45.5 P1.5
GPIO5_1: P1.4 U1.13 | length 6.7
  Top Layer w0.254: U1.13@56.175,41.925 57.805,41.925 P1.4
GPIO5_2: P2.11 U2.13 | length 9.6
  Top Layer w0.254: P2.11 46.925,5.575 U2.13@51.85,5.575
GPIO5_3: P2.10 U2.14 | length 8.6
  Top Layer w0.254: P2.10 48.89,5 52.446,5 52.55,5.104 U2.14
GPIO5_4: P2.9 U2.15 | length 6.7
  Top Layer w0.254: P2.9 50.93,4.5 52.723,4.5 53.2,4.977 U2.15
GPIO5_5: P2.8 U2.16 | length 4.9
  Top Layer w0.254: P2.8 53.85,4.88 U2.16
GPIO5_6: P2.7 U2.17 | length 4.1
  Top Layer w0.254: P2.7 53.76,3.491 54.5,4.231 U2.17
GPIO5_7: P2.6 U2.18 | length 4.3
  Top Layer w0.254: U2.18 55.15,4.436 56.3,3.286 P2.6
GPIO5_8: P2.5 U2.19 | length 5.3
  Top Layer w0.254: U2.19 55.8,4.977 58.527,2.25 P2.5
GPIO5_9: P2.4 U2.20 | length 7.2
  Top Layer w0.254: U2.20 56.45,4.977 57.427,4 59.63,4 P2.4
GPIO5_10: P2.3 U2.21 | length 9
  Top Layer w0.254: U2.21 57.1,4.977 57.577,4.5 61.5,4.5 63.75,2.25 P2.3
GPIO5_11: P2.2 U2.22 | length 10.8
  Top Layer w0.254: U2.22 57.75,5.226 57.976,5 63.71,5 P2.2
GPIO33_0: 1.8 R4.4 U1.11 | length 41.6
  Top Layer w0.254: U1.11@55.5,36.125 55.5,32.849 55.351,32.7 48.26,32.7 1.8 48.64,28.4 R4.4
GPIO33_1: 1.7 R4.2 U1.12 | length 36.7
  Top Layer w0.203: U1.12 56.2,33.01 55.159,31.969 50.069,31.969 1.7 50.38,29.2 R4.2
GPIO33_2: 1.33/A14 R9.2 U2.12 | length 49.5
  Top Layer w0.254: R9.2 7.44,18.8 1.33/A14 15.24,11 50.925,11 U2.12@51.85,11.925
GPIO33_3: 1.34/A15 R9.4 U2.11 | length 51.2
  Top Layer w0.254: R9.4 9.18,19.6 1.34/A15 17.03,11.75 33.291,11.75 34.468,12.927 52.328,12.927 52.55,12.705 U2.11
GPIO33_4: 1.37/A18 R9.6 U2.10 | length 56.7
  Top Layer w0.254: R9.6 16,20.4 1.37/A18 20.95,15.45 20.95,13.55 v1(21,13.5) ; v1(21,9.5) 51.5,9.5 53.2,11.2 U2.10
  Bottom Layer w0.254: v1(21,9.5) v1(21,13.5)
GPIO33_5: 1.38/A19 R9.8 U2.9 | length 60
  Top Layer w0.254: R9.8 17.74,21.2 1.38/A19 23.47,15.47 23.47,13.03 v1(23.5,13) ; v1(23.5,8) 51,8 53.85,10.85 U2.9
  Bottom Layer w0.254: v1(23.5,8) v1(23.5,13)
GPIO33_6: 1.18/A4/SDA R8.1 U2.8 | length 36.2
  Top Layer w0.254: U2.8 54.427,11.998 54.427,12.572 54.377,12.622 54.377,12.735 53.612,13.5 50.84,13.5 1.18/A4/SDA 58.04,24.7 R8.1
GPIO33_7: 1.19/A5/SCL R6.1 U2.7 | length 31.2
  Top Layer w0.254: U2.7 55.15,13.35 54.5,14 52.88,14 1.19/A5/SCL 51.38,15.83 51.726,16.176 51.726,16.226 57.3,21.8 R6.1
GPIO33_8: 1.20/A6 R7.2 U2.6 | length 25.8
  Top Layer w0.254: U2.6 55.8,13.62 1.20/A6 58.02,19.6 R7.2
GPIO33_9: 1.21/A7 R7.4 U2.5 | length 22.1
  Top Layer w0.254: U2.5 56.46,11.935 1.21/A7 59.76,18.8 R7.4
GPIO33_10: 1.22/A8 R7.6 U2.4 | length 20
  Top Layer w0.254: U2.4 57.1,13.6 61.5,18 R7.6
GPIO33_11: 1.23/A9 R7.8 U2.3 | length 18.9
  Top Layer w0.254: U2.3 57.75,13.25 58.476,13.976 60.016,13.976 1.23/A9 63.24,17.2 R7.8
INJSW: 1.0/RX P1.2 | length 14.8
  Top Layer w0.254: P1.2 66.54,45.42 66.54,30.82 1.0/RX
Net1_21/DAC0: 1.21/DAC0 R10.1 SW2.4 | length 29.2
  Top Layer w0.254: SW2.4 15.945,2.92 ; R10.1 17.075,4.05 15.945,2.92 ; v1(28.5,6.5) 28.306,6.306 24.306,6.306 20.92,2.92 15.945,2.92
  Bottom Layer w0.254: v1(28.5,6.5) 28.51,6.51 28.51,15.49 1.21/DAC0
Net1_30: 1.30 R1.1 R2.2 SW1.2 | length 20.6
  Top Layer w0.254: 1.30 14.25,32.31 14.25,34.5 14.25,42.5 16.3,42.5 R1.1@17.2,43.4 ; R1.1 R1.1@17.2,43.4 ; R2.2 17.2,39.1 R1.1@17.2,43.4
Net1_31/A12: 1.31/A12 R3.2 | length 8.7
  Top Layer w0.254: R3.2 6.1,34.2 7.8,32.5 11.5,32.5 13.26,30.74 1.31/A12
Net1_35/A16: 1.35/A16 R10.7 SW2.1 | length 19.9
  Top Layer w0.254: v1(9.75,10.5) 12.527,10.5 ; SW2.1 12.527,10.54 12.527,10.5 ; R10.7 17.075,6.45 13.025,10.5 12.527,10.5
  Bottom Layer w0.254: v1(9.75,10.5) 13.5,10.5 15.82,12.82 1.35/A16
Net1_36/A17: 1.36/A17 R10.5 SW2.2 | length 22.1
  Top Layer w0.254: v1(9.75,8) 13.499,8 15.849,5.65 R10.5
  Bottom Layer w0.254: v1(9.75,8) 14,8 18.36,12.36 1.36/A17
Net1_39/A20: 1.39/A20 R10.3 SW2.3 | length 39.2
  Top Layer w0.254: R10.3 14.979,4.85 14.369,5.46 11.45,5.46 11.027,5.037 10,4.01 10,2.5 11,1.5 24.5,1.5 v1(26,3)
  Bottom Layer w0.254: 1.39/A20 25.99,15.49 25.99,3.01 v1(26,3)
NetC1_2: C1.2 R1.2 | length 3.4
  Top Layer w0.254: R1.2 C1.2
NetC2_2: C2.2 R11.1 U2.23 U2.24 | length 7.5
  Top Layer w0.508: U2.23@58.454,6.238 59.15,6.238 C2.2@62.187,6.238 ; C2.2 65.056,6.4 65.21,6.554 65.354,6.554 65.7,6.9 R11.1
NetC3_2: C3.2 R12.1 U1.23 U1.24 | length 12.7
  Top Layer w0.508: C3.2 37.6,42.7 40.15,42.7 R12.1 40.35,42.9 42.15,42.9 v1(42.25,43) ; v1(46.75,42) 46.788,41.962 U1.23@49.546,41.962
  Bottom Layer w0.508: v1(42.25,43) 44.75,43 45.79,41.96 46.71,41.96 v1(46.75,42)
NetD1_2: D1.2 R3.1 | length 3.1
  Top Layer w0.254: D1.2 3.2,36.8 R3.1
SPI_MISO5: P1.10 U1.19 | length 8.5
  Top Layer w0.254: P1.10 48.172,43.468 51.532,43.468 52.185,42.815 U1.19@52.185,41.44
SPI_MISO33: 1.12/MISO R5.6 U1.6 | length 50.3
  Top Layer w0.254: R5.6 32.8,27.4 1.12/MISO 40.1,34.7 51.512,34.7 52.127,35.315 52.127,36.002 U1.6
SPI_MOSI5: P1.9 U1.18 | length 6.9
  Top Layer w0.254: P1.9 50.18,44 52,44 52.85,43.15 U1.18@52.85,41.425
SPI_MOSI33: 1.11/MOSI R5.4 U1.7 | length 51.3
  Top Layer w0.254: R5.4 34.54,26.6 1.11/MOSI 42.14,34.2 51.662,34.2 52.777,35.315 52.777,36.002 U1.7
SPI_SCLK5: P1.8 U1.17 | length 4.5
  Top Layer w0.254: P1.8 53.5,43.22 U1.17
SPI_SCLK33: 1.13/SCK R5.2 U1.8 | length 73.6
  Top Layer w0.254: R5.2 34.2,25.8 36.25,23.75 36.25,15.61 1.13/SCK ; U1.8 53.5,37.25 v1(54.25,38)
  Bottom Layer w0.254: 1.13/SCK 39.09,18.45 42.4,18.45 52.675,28.725 52.675,36.425 v1(54.25,38)
pads on no net: 1.2 1.3/CANTX 1.4/CANRX 1.5 1.6 1.14/A0 1.15/A1 1.16/A2 1.17/A3 1.24 1.25 1.26 1.27 1.28 1.32/A13 1.A22/DAC1 1.AGND 1.GND2 U1.3 U1.4 U1.21 U1.22

## Polygon pours and split planes (outlines as drawn)
GND on Bottom Layer "GND_L02_P000" (solid, pour order 0): 77,1 1,1 1,47 77,47

## Keep-outs
Keep-Out Layer:
  the board outline again, w0.254

## Text inside footprints (layer, text, board x,y; h text height)
1: Mechanical 16 "3.6" at 38.521,24.231 h2.76 r180; Mechanical 16 "TEENSY" at 38.521,22.009 h2.76 r180; Top Overlay "3.6" at 38.521,24.231 h2.76 r180; Top Overlay "TEENSY" at 38.521,22.009 h2.76 r180